# Altium PCB PD_receiver.PcbDoc
Units mil, origin at the board's own origin, x right, y up, seen from the top; angles counter-clockwise.
Board outline 787.4 x 787.4 mil, 2 copper layers (Top Layer, Bottom Layer), stack 62.644 mil thick; 20 components, 10 nets, 51 pads, 17 vias.
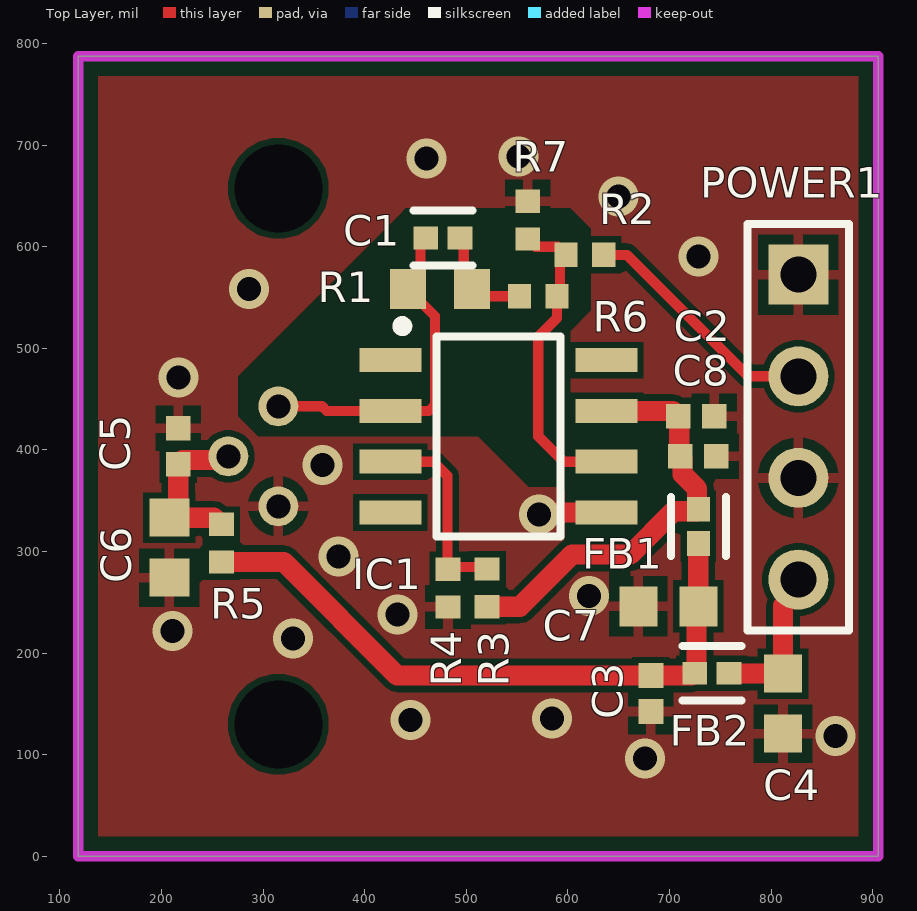
[diagram p0: Top Layer view]
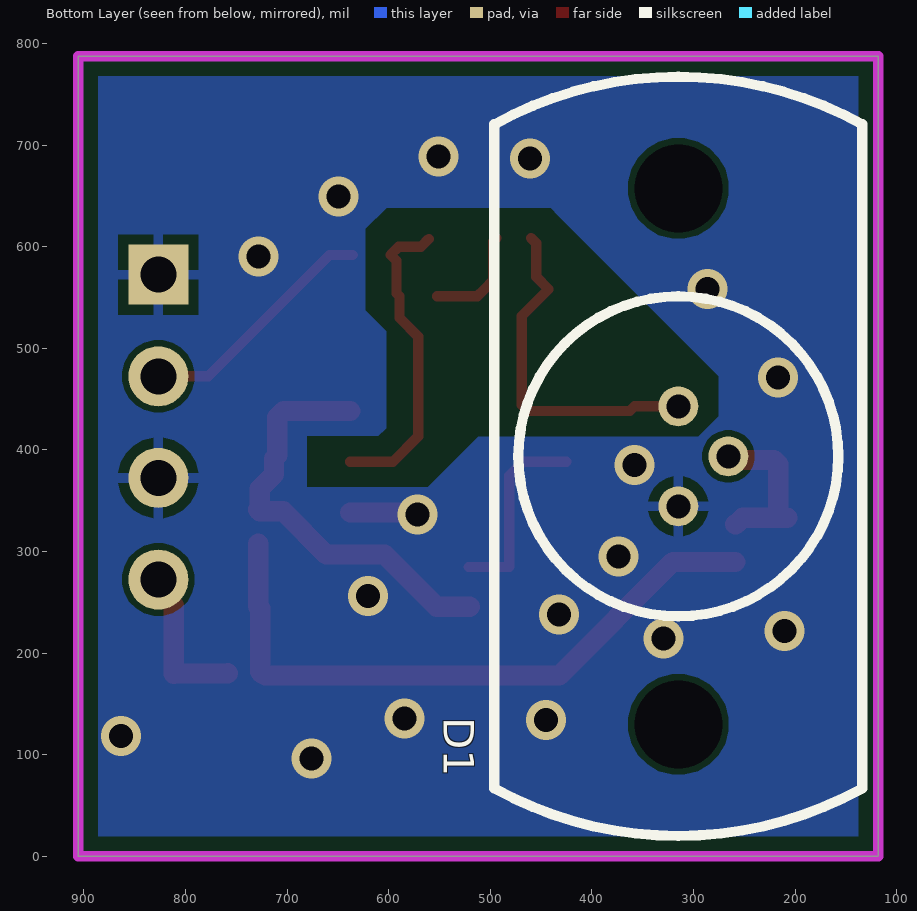
[diagram p1: Bottom Layer view, seen from below]
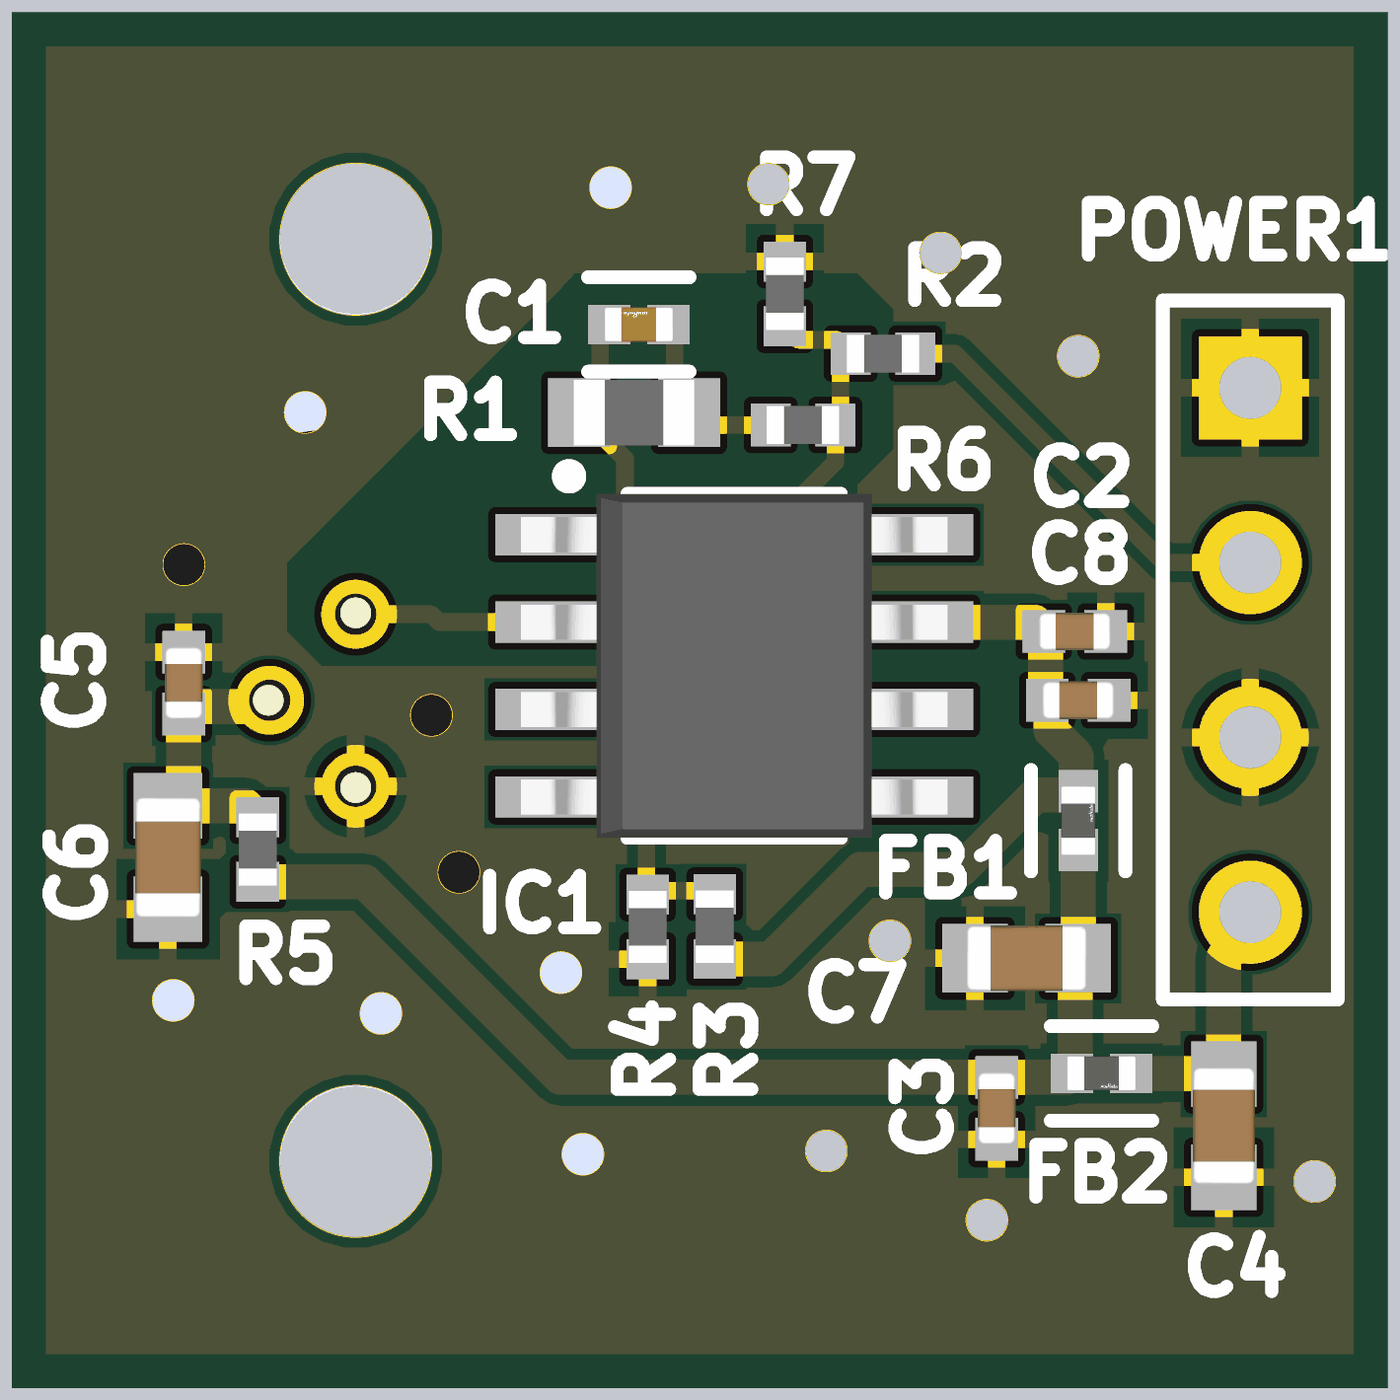
[diagram p2: 3D render of the assembled board from above, using the file's embedded part models]

## Layer stack, top to bottom
Top Solder: solder mask 0.4, Solder Resist, Dk 3.5
Top Layer: signal copper 1.4
Dielectric 1: dielectric 59.8441, FR-4, Dk 4.8
Bottom Layer: signal copper 1.4
Bottom Solder: solder mask 0.4, Solder Resist, Dk 3.5

## Board outline
118.11,0 118.11,787.4 905.51,787.4 905.51,0

## Design rules (kind name [scope] priority, off if disabled: settings)
Clearance [All] p1: gap=6 ignorepadtopadclearanceinfootprint=FALSE except(0: Arc-Hole Track-Hole SMDPad-Hole THPad-Hole Via-Hole Fill-Hole Poly-Hole Region-Hole Text-Hole)
PlaneConnect [All] p1: pad.planeconnectstyle=Relief pad.reliefexpansion=20 pad.reliefentries=4 pad.reliefconductorwidth=10 pad.reliefairgap=10 via.planeconnectstyle=Direct via.reliefexpansion=20 via.reliefentries=4 via.reliefconductorwidth=10 via.reliefairgap=10
PolygonConnect [All] p1: thpad.connectstyle=Relief thpad.reliefconductorwidth=10 thpad.reliefentries=4 thpad.polygonreliefangle="90 Angle" thpad.airgapwidth=10 smdpad.connectstyle=Relief smdpad.reliefconductorwidth=10 smdpad.reliefentries=4 smdpad.polygonreliefangle="90 Angle" smdpad.airgapwidth=10 via.connectstyle=Direct via.reliefconductorwidth=10 via.reliefentries=4 via.polygonreliefangle="90 Angle" via.airgapwidth=10
RoutingVias [All] p1: holewidth=23.62 width=39.37 viastyle="Through Hole" minholewidth=23.62 minwidth=39.37 maxholewidth=28 maxwidth=50
SolderMaskExpansion [All] p1: expansion=4 istentingtop=FALSE
Width [All] p1: maxlimit=100 minlimit=10 preferedwidth=10
29 further rules are at their usual default settings.

## Components (designator, comment, footprint, x,y, rotation, side; value= is the part's Value field where it differs from the comment)
C1 "GCQ1555C1H1R2WB01D" FP-GCQ155-0_05-IPC_B 476.95,608.72 r180 top
C2 "100nF" CAPC1005X55N 728.35,393.7 r180 top
C3 "100nF" CAPC1005X55N 681.65,160.24 r90 top
C4 "2.2uF" CAPC1608X90N 811.65,150.24 r90 top
C5 "10nF" CAPC1005X55N 216.54,403.54 r270 top
C6 "4.7uF" CAPC1709X95N 207.61,303.74 r90 top
C7 "4.7uF" CAPC1709X95N 698.82,246.06 r0 top
C8 "10nF" CAPC1005X55N 726.38,433.07 r180 top
D1 "PD" PD_FTP_BM1 314.96,393.7 r0 bottom
FB1 "BLM15BD601SN1J" FP-BLM15-0_05-IPC_B 728.35,324.8 r90 top
FB2 "BLM15BD601SN1J" FP-BLM15-0_05-IPC_B 741.65,180.24 r0 top
IC1 "LTC6268IS8#TRPBF" SOIC127P600X175-8N 531.5,413.39 r0 top
POWER1 "Header 4" HDR1X4 826.77,572.44 r270 top
R1 "2k" RESC1608X55N 474.23,558.2 r0 top
R2 "50" RESC1005X35N 616.69,592.01 r0 top
R3 "100" RESC1005X35N 520.38,264.18 r90 top
R4 "100" RESC1005X35N 482,264 r90 top
R5 "100" RESC1005X40N 258.96,308.26 r270 top
R6 "10" RESC1005X40N 570.87,551.18 r180 top
R7 "100" RESC1005X35N 560.5,626.2 r90 top

## Footprints (in the part's own frame and the unit in brackets; to place one, negate y for a bottom-side part, rotate by r counter-clockwise, add the part's x,y. Pads: shape width x height; smd on the part's side, far side on the other; paste and mask are expansions set on the pad)
CAPC1005X55N [mm] "Capacitor, Non-Polarized, Chip; 1.00mm L X 0.50mm W X 0.70mm H, IPC Medium Density"
  rect 0.62x0.62 smd: 1(-0.45,0) 2(0.45,0)
  body extent -0.52,-0.27 0.53,0.28, height 0.55
CAPC1608X90N [mm] "Chip Capacitor, Body 1.6x0.8mm IPC Medium Density"
  rect 0.95x0.95 smd: 1(-0.75,0) 2(0.75,0)
  body extent -0.85,-0.45 0.85,0.45, height 0.9
CAPC1709X95N [mm] "Capacitor, non-Polarized, Chip; 1.65mm L X 0.85mm W X 0.95mm H,IPC Medium Density"
  rect 0.95x1 smd: 1(-0.75,0) 2(0.75,0)
  body extent -0.87,-0.47 0.88,0.48, height 0.95
FP-BLM15-0_05-IPC_B [mil]
  rect 24.23x22.54 smd paste+0 mask+0: 1(-16.87,0) 2(16.87,0)
  silkscreen extent -29,-27 29,27, body extent -35,-17 35,17, height 10
FP-GCQ155-0_05-IPC_B [mil]
  rect 24.23x22.54 smd paste+0 mask+0: 1(-16.87,0) 2(16.87,0)
  silkscreen extent -29,-27 29,27, body extent -35,-17 35,17, height 10
HDR1X4 [mm] "Connector; Header; 4 Position"
  rect 1.5x1.5 hole 0.9: 1(0,0)
  round 1.5 hole 0.9: 2(2.54,0) 3(5.08,0) 4(7.62,0)
  silkscreen extent -1.27,-1.27 8.89,1.27
PD_FTP_BM1 [mm]
  round 1 hole 0.6: 1(0,-1.25) 2(-1.25,0) 3(0,1.25)
  round 0 hole 2.2: ""(0,-6.7) ""(0,6.7)
  silkscreen extent -4.6,-9.49 4.6,9.49, body extent -4.6,-9.5 4.6,9.5, height 14
RESC1005X35N [mm] "Chip Resistor, EIA 0402, Metric 1005, Body 1.0x0.5mm, IPC Medium Density"
  rect 0.58x0.62 smd: 1(-0.47,0) 2(0.47,0)
  body extent -0.52,-0.27 0.53,0.28, height 0.35
RESC1005X40N [mm] "Chip Resistor, EIA 0402, Metric 1005, Body 1.0x0.5mm, IPC Medium Density"
  rect 0.58x0.62 smd: 1(-0.47,0) 2(0.47,0)
  body extent -0.52,-0.27 0.53,0.28, height 0.4
RESC1608X55N [mm] "Chip Resistor, EIA 0603, Metric 1608, Body 1.6x0.8mm, IPC Medium Density"
  rect 0.9x1 smd: 1(-0.8,0) 2(0.8,0)
  body extent -0.87,-0.47 0.88,0.48, height 0.55
SOIC127P600X175-8N [mm] "SOIC 8, Pitch 1.27mm - Body 4x5mm, IPC Medium Density"
  rect 1.55x0.6 smd: 1(-2.7,1.905) 2(-2.7,0.635) 3(-2.7,-0.635) 4(-2.7,-1.905) 5(2.7,-1.905) 6(2.7,-0.635) 7(2.7,0.635) 8(2.7,1.905)
  silkscreen extent -2.52,-2.5 1.55,2.88, body extent -3.1,-2.5 3.1,2.5, height 1.75

## Part data
C1: library part CMP-06035-042014-1, "High Q Ceramic Capacitor for Automotive 1.2pF ±0.05pF 50VDC C0G 0402 Paper T/R"
C2 C3: library part CC0402_100NF_16V_10%_X5R, "Non-polarised capacitor", Case=0402, Manufacturer=GENERIC, Manufacturer1 ComponentHeight=0.55mm, Manufacturer1 Example=MURATA, Manufacturer1 Part Number=GRM155R61C104KA88D, Tolerance=±10%, Voltage=16V, Author="CERN DEM JLC", Component Type=Standard, CreateDate=10.12.2013, HelpURL=\\cern.ch\dfs\Applications\Altium\Datasheets\CC0402_X5R_MURATA_GRM.pdf, LatestRevisionDate=10.12.2013, Manufacturer Part Number=CC0402_100NF_16V_10%_X5R, Mounted=Yes, Part Description="SMD Multilayer Chip Ceramic Capacitor", Part Number=CC0402_100NF_16V_10%_X5R, Pin Count=2, Sense=No, SMD=Yes, Socket=No, Status=None, TC=X5R
C4: library part CC0603_2.2UF_10V_20%_X7R, "Non-polarised capacitor", Case=0603, Manufacturer=GENERIC, Manufacturer1 ComponentHeight=0.9mm, Manufacturer1 Example="TAIYO YUDEN", Manufacturer1 Part Number=LMK107B7225MA-T, Tolerance=±20%, Voltage=10V, Author="CERN DEM JLC", Component Type=Standard, CreateDate=22.06.2011, HelpURL=\\cern.ch\dfs\Applications\Altium\Datasheets\CC0603_X7R_TAIYO-YUDEN_HIGH-VALUE.pdf, LatestRevisionDate=27.06.2011, Manufacturer Part Number=CC0603_2.2UF_10V_20%_X7R, Mounted=Yes, Part Description="SMD Multilayer Chip Ceramic Capacitor", Part Number=CC0603_2.2UF_10V_20%_X7R, Pin Count=2, Sense=No, SMD=Yes, Socket=No, Status="Not Recommended", TC=X7R
C5 C8: library part CC0402_10NF_16V_10%_X7R, "Non-polarised capacitor", Case=0402, Manufacturer=GENERIC, Manufacturer1 ComponentHeight=0.55mm, Manufacturer1 Example=PHYCOMP, Manufacturer1 Part Number=223878715636, Tolerance=±10%, Voltage=16V, Author="CERN DEM JLC", Component Type=Standard, CreateDate=03.12.2007, HelpURL=\\cern.ch\dfs\Applications\Altium\Datasheets\CC0402_X7R_PHYCOMP.pdf, LatestRevisionDate=03.12.2007, Manufacturer Part Number=CC0402_10NF_16V_10%_X7R, Mounted=Yes, Part Description="SMD Multilayer Chip Ceramic Capacitor", Part Number=CC0402_10NF_16V_10%_X7R, Pin Count=2, Sense=No, SMD=Yes, Socket=No, Status="Not Recommended", TC=X7R
C6 C7: library part CC0603_4.7UF_16V_10%_X5R, "Non-polarised capacitor", Case=0603, Manufacturer=GENERIC, Manufacturer1 ComponentHeight=0.95mm, Manufacturer1 Example="TAIYO YUDEN", Manufacturer1 Part Number=EMK107ABJ475KA-T, Tolerance=±10%, Voltage=16V, Author="CERN DEM JLC", Component Type=Standard, CreateDate=16.12.2013, HelpURL=\\cern.ch\dfs\Applications\Altium\Datasheets\CC0603_X7R_TAIYO-YUDEN_HIGH-VALUE.pdf, LatestRevisionDate=16.09.2014, Manufacturer Part Number=CC0603_4.7UF_16V_10%_X5R, Mounted=Yes, Part Description="SMD Multilayer Chip Ceramic Capacitor", Part Number=CC0603_4.7UF_16V_10%_X5R, Pin Count=2, Sense=No, SMD=Yes, Socket=No, Status=None, TC=X5R
D1: "Photodiode"
FB1 FB2: library part CMP-0686-00193-4, "Chip Ferrite Bead, 0402, 600Ω @ 100MHz, 0.65Ω, 25%, 200mA", Case/Package=0402, Current Rating=200mA, DC Resistance (DCR)=650mR, Max Operating Temperature=125°C, Min Operating Temperature=-55°C, Package Quantity=50000, Test Frequency=100MHz, Tolerance=25%, Height=0.5mm, Impedance=600R, Length=1mm, Max DC Current=200mA, Number Of Circuits=1, Number of Pins=2, Packaging="Tape and Reel", RoHS Compliant=Yes, Series=BLM, Termination=SMD/SMT, Width=0.5mm
IC1: "500MHz Ultra-Low Bias Current FET Input Operational Amplifier", Case=SOIC8, Manufacturer="LINEAR TECHNOLOGY", Author="CERN DEM JLC", Bonding=No, Component Type=Standard, ComponentHeight=1.75mm, CreateDate=02.12.2014, Device=LTC6268IS8#TRPBF, HelpURL=\\cern.ch\dfs\Applications\Altium\Datasheets\LTC6268IS8#TRPBF.pdf, LatestRevisionDate=02.12.2014, Manufacturer Part Number=LTC6268IS8#TRPBF, Mounted=Yes, PackageDescription="SOIC 8, Pitch 1.27mm - Body 4x5mm, IPC Medium Density", Part Description="500MHz Ultra-Low Bias Current FET Input Operational Amplifier", Part Number=LTC6268IS8#TRPBF, Pin Count=8, PressFit=No, Sense=No, SMD=Yes, Socket=No
POWER1: "Header, 4-Pin", LatestRevisionDate=17-Jul-2002, LatestRevisionNote="Re-released for DXP Platform.", Publisher="Altium Limited"
R1: library part R0603_2K_0.1%_0.063W_10PPM, "Resistor - 0.1%", Case=0603, Manufacturer=GENERIC, Manufacturer1 ComponentHeight=0.5mm, Manufacturer1 Example="TYCO HOLSWORTHY", Manufacturer1 Part Number=RN73C1J2K0BTDF, Power=0.063W, Tolerance=±0.1%, Author="CERN DEM JLC", Component Type=Standard, CreateDate=03.12.2007, HelpURL=\\cern.ch\dfs\Applications\Altium\Datasheets\R0603_Tyco_RN73.pdf, LatestRevisionDate=13.03.2008, Manufacturer Part Number=R0603_2K_0.1%_0.063W_10PPM, Mounted=Yes, Part Description="Thin Film Chip Resistor", Part Number=R0603_2K_0.1%_0.063W_10PPM, Pin Count=2, PressFit=No, Sense=No, SMD=Yes, Socket=No, Status="Not Recommended", TC=±10ppm
R2: library part R0402_50R_0.1%_0.05W_25PPM, "Resistor - 0.1%", Case=0402, Manufacturer=GENERIC, Manufacturer1 ComponentHeight=0.38mm, Manufacturer1 Example="VISHAY DALE", Manufacturer1 Part Number=FC0402E50R0BTBS, Power=0.05W, Tolerance=±0.1%, Author="CERN DEM JMW", Component Type=Standard, CreateDate=11.08.2016, HelpURL=\\cern.ch\dfs\Applications\Altium\Datasheets\R0402_VISHAY_FC.pdf, LatestRevisionDate=11.08.2016, Manufacturer Part Number=R0402_50R_0.1%_0.05W_25PPM, Mounted=Yes, Part Description="Thin Film Precision Resistor", Part Number=R0402_50R_0.1%_0.05W_25PPM, Pin Count=2, PressFit=No, Sense=No, SMD=Yes, Socket=No, Status="Not Recommended", TC=±25ppm/°C
R3 R4 R7: library part R0402_100R_0.1%_0.063W_25PPM, "Resistor - 0.1%", Case=0402, Manufacturer=GENERIC, Manufacturer1 ComponentHeight=0.35mm, Manufacturer1 Example="TE CONNECTIVITY", Manufacturer1 Part Number=CPF0402B100RE1, Power=0.063W, Tolerance=±0.1%, Author="CERN DEM JMW", Component Type=Standard, CreateDate=22.09.2015, HelpURL=\\cern.ch\dfs\Applications\Altium\Datasheets\R0402_TYCO_CPF.pdf, LatestRevisionDate=22.09.2015, Manufacturer Part Number=R0402_100R_0.1%_0.063W_25PPM, Mounted=Yes, Part Description="Thin Film Precision Resistor", Part Number=R0402_100R_0.1%_0.063W_25PPM, Pin Count=2, PressFit=No, Sense=No, SMD=Yes, Socket=No, Status="Not Recommended", TC=±25ppm/°C
R5: library part R0402_100R_1%_0.0625W_100PPM, "Resistor - 1%", Case=0402, Manufacturer=GENERIC, Manufacturer1 ComponentHeight=0.4mm, Manufacturer1 Example="YAGEO PHYCOMP", Manufacturer1 Part Number=232270671001L, Power=0.0625W, Tolerance=±1%, Author="CERN DEM JLC", Component Type=Standard, CreateDate=03.12.2007, HelpURL=\\cern.ch\dfs\Applications\Altium\Datasheets\R0402_Phycomp_RC0402.pdf, LatestRevisionDate=17.10.2012, Manufacturer Part Number=R0402_100R_1%_0.0625W_100PPM, Mounted=Yes, Part Description="General Purpose Thick Film Chip Resistor", Part Number=R0402_100R_1%_0.0625W_100PPM, Pin Count=2, PressFit=No, Sense=No, SMD=Yes, Socket=No, Status="Not Recommended", TC=±100ppm/°C
R6: library part R0402_10R_1%_0.0625W_200PPM, "Resistor - 1%", Case=0402, Manufacturer=GENERIC, Manufacturer1 ComponentHeight=0.4mm, Manufacturer1 Example="YAGEO PHYCOMP", Manufacturer1 Part Number=232270671009L, Power=0.0625W, Tolerance=±1%, Author="CERN DEM JLC", Component Type=Standard, CreateDate=24.06.2009, HelpURL=\\cern.ch\dfs\Applications\Altium\Datasheets\R0402_Phycomp_RC0402.pdf, LatestRevisionDate=17.10.2012, Manufacturer Part Number=R0402_10R_1%_0.0625W_200PPM, Mounted=Yes, Part Description="General Purpose Thick Film Chip Resistor", Part Number=R0402_10R_1%_0.0625W_200PPM, Pin Count=2, PressFit=No, Sense=No, SMD=Yes, Socket=No, Status="Not Recommended", TC=±200ppm/°C

## Via types
v1: diameter 39.37, hole 23.62, Top Layer to Bottom Layer, tented both sides, 17 vias

## Nets (pads, with @x,y where several pads share a name; then routed paths per layer and width w, separated by ;. In a path a pad name is that pad's centre, name@x,y a point inside that pad or via, vN(x,y) a via of type N, cw(c..) or ccw(c..) an arc to the next point about the centre after c; other vN are vias at no path point)
5V0: C3.2 C7.2 FB1.1 FB2.1 R5.2 | length 642.6
  Top Layer w20: R5.2 320.24,289.76 432.05,177.95 C3.2 721.65,177.95 723.94,180.24 FB2.1 725.29,180.24 726.56,181.51 726.56,244.28 C7.2 FB1.1
GND: C2.1 C3.1 C4.1 C5.1 C6.1 C7.1 C8.1 D1.3 IC1.5 POWER1.1 POWER1.3 R4.1 R7.2 | length 63.2
  Top Layer w20: v1@574.61,338.39 IC1.5
  other v1: 676.06,96.21 863.61,118.4 444.96,133.95 584.27,135.81 329.41,214.55 210.6,222.01 432.38,237.85 620.61,256.02 374.02,295.28 571.69,336.62 358.3,385.08 216.66,471.27 286.08,558.4 728.35,590.55 649.61,649.61 460.8,686.99 551.18,688.98
NetC1_1: C1.1 R1.2 R6.2 | length 105
  Top Layer w10: C1.1 497.48,605.05 497.48,566.44 R1.2 512.74,551.18 R6.2
NetC1_2: C1.2 D1.1 IC1.2 R1.1 | length 341
  Top Layer w10: D1.1 358.09,442.91 362.61,438.39 IC1.2 463.2,438.39 469.06,444.24 469.06,531.88 R1.1 454.84,570.31 454.84,603.49 C1.2
NetC4_2: C4.2 FB2.2 POWER1.4 | length 152.3
  Top Layer w20: FB2.2 758.76,180 811.42,180 C4.2 811.65,246.75 826.77,261.87 POWER1.4
NetIC1_3: IC1.3 R3.2 R4.2 | length 191.8
  Top Layer w10: IC1.3 467.61,388.39 481.38,374.62 481.38,284.68 R3.2@521.38,284.68
NetIC1_6: IC1.6 R2.1 R6.1 R7.1 | length 311.4
  Top Layer w10: R7.1 568.26,599.94 590.26,599.94 R2.1 592.31,586.13 592.31,554.12 R6.1 589.37,529.95 570.87,511.45 570.87,413.39 595.87,388.39 IC1.6
NetPOWER1_2: POWER1.2 R2.2 | length 241.1
  Top Layer w10: R2.2 657.99,592.01 777.56,472.44 POWER1.2
V_PD: C5.2 C6.2 D1.2 R5.1 | length 150.4
  Top Layer w20: C6.2 251.67,333.27 258.17,326.77 R5.1 ; C6.2@216.54,341.97 C5.2 220.7,389.99 262.04,389.99 D1.2
VCC_AMP: C2.2 C8.2 FB1.2 IC1.7 R3.1 | length 420.8
  Top Layer w20: R3.1 552.68,245.68 604,297 661.36,297 703.92,339.56 727.08,339.56 728.35,340.83 FB1.2 727.08,342.94 727.08,361.92 712.83,376.17 712.83,391.5 709.65,394.69 709.65,432.09 703.35,438.39 IC1.7
pads on no net: D1. IC1.1 IC1.4 IC1.8

## Polygon pours and split planes (outlines as drawn)
GND on Bottom Layer "GND_L02_P001" (solid, remove dead copper, pour order 1): 885.83,767.72 137.8,767.72 137.8,19.68 885.83,19.68
GND on Top Layer "GND_L01_P000" (solid, remove dead copper, pour order 0): 885.83,767.72 137.8,767.72 137.8,19.68 885.83,19.68

## Keep-outs
Keep-Out Layer:
  the board outline again, w10

## Other copper
Multi-Layer:
  pour cut-out: 433.07,629.92 275.59,472.44 275.59,433.07 295.28,413.39 511.81,413.39 561.41,363.79 680.25,363.79 680.25,400.26 680.25,413.39 667.12,413.39 610.24,413.39 602.07,421.55 602.07,516.96 622.58,537.46 622.58,617.48 602.07,637.98 440.41,637.98

## Silkscreen, mask and mechanical layers (free items; w line width, h text height)
Mechanical 1:
  drawing of 2010 lines, arcs and shapes, not listed
  text "2.2mm" at 16267.88,24164.67 h83.33
  text "0.09in" at 16233.39,24015.37 h83.33
  text "4.0mm" at 20271.99,23985.33 h83.33
  text "0.16in" at 20237.49,23836.03 h83.33
  text "11.0mm" at 17686.73,23680.45 h83.33
  text "0.43in" at 17745.94,23548.14 h83.33
  text "13.9mm" at 18667.05,23522.02 h83.33
  text "0.55in" at 18726.26,23389.71 h83.33
  text "2.5mm" at 16271.35,23097.89 h83.33
  text "PIN 3" at 14124.97,23073.35 h83.33
  text "0.10in" at 16240.21,22965.58 h83.33
  text "16.6mm" at 22395.1,22555.62 h83.33
  text "13.4mm" at 21820.58,22538.72 h83.33
  text "19.0mm" at 23068,22538.72 h83.33
  text "PIN 2" at 14128.8,22479.54 h83.33
  text "0.53in" at 21879.79,22406.41 h83.33
  text "0.65in" at 22454.29,22406.31 h83.33
  text "0.75in" at 23067.67,22406.41 h83.33
  text "8.0mm" at 16271.35,21979.55 h83.33
  text "PIN 1" at 14124.97,21955.01 h83.33
  text "0.31in" at 16240.21,21847.24 h83.33
  text "2.0mm" at 19306.62,21556.4 h83.33
  text "0.08in" at 19335.02,21424.09 h83.33
  text "9.2mm" at 21094,21396.99 h83.33
  text "BOTTOM VIEW" at 14802.17,21372.41 h125
  text "0.36in" at 21122.4,21264.67 h83.33
  text "6.5mm" at 18406.52,21160.77 h83.33
  text "PIN 3" at 22528.23,21135.86 h83.33
  text "0.26in" at 18434.92,21028.45 h83.33
  text "PIN 2" at 22113.75,20158.23 h83.33
  text "CASE" at 21838.86,19456.65 h83.33
  text "PIN 1" at 22528.23,19157.04 h83.33
  text "DRAWING" at 20425.96,18626.54 h83.33
  text "PROJECTION" at 20425.96,18515.43 h83.33
  text "w w w . t h o r  l a b s . c o m" at 22585.59,18413.3 h83.33
  text "NAME" at 20952.69,18296.23 h83.33
  text "DATE" at 21570.3,18296.23 h83.33
  text "FGA01FC, InGaAs PHOTODIODE, FC/PC" at 23267,18188.87 h93.75
  text "JV" at 21045.94,18118.89 h83.33
  text "12/20/16" at 21422.73,18118.89 h83.33
  text "DRAWN" at 20413.46,18108.53 h72.92
  text "MATERIAL" at 22074.45,17981.35 h83.33
  text "REV" at 24235.93,17949.83 h83.33
  text "RH" at 21045.94,17942.67 h83.33
  text "12/20/16" at 21422.73,17942.67 h83.33
  text "APPROVAL" at 20341.22,17932.31 h72.92
  text "N/A" at 23145.21,17835.22 h125
  text "C" at 24330.42,17835.22 h125
  text "FOR INFORMATION ONLY" at 16848.2,17802.07 h125
  text "COPYRIGHT © 2010 BY THORLABS" at 20605.85,17738.98 h62.5
  text "ITEM #" at 22085.49,17647.7 h83.33
  text "APPROX WEIGHT" at 23574.91,17647.7 h83.33
  text "NOT FOR MANUFACTURING PURPOSES" at 16860.96,17635.4 h125
  text "VALUES IN PARENTHESIS ARE CALCULATED" at 21221.31,17571.75 h60
  text "FGA01FC" at 22790.28,17520.97 h125
  text ".01 kg" at 24034.28,17520.97 h125
  text "AND MAY CONTAIN ROUNDOFF ERRORS" at 21220.15,17472.38 h60